# Altium PCB Segway_Charging_Board_PCB.PcbDoc
Units mm, origin at the board's own origin, x right, y up, seen from the top; angles counter-clockwise.
Board outline 37 x 41 mm, 4 copper layers (Top Layer, Layer 1, Layer 2, Bottom Layer), stack 1.57 mm thick; 43 components, 22 nets, 119 pads, 140 vias.
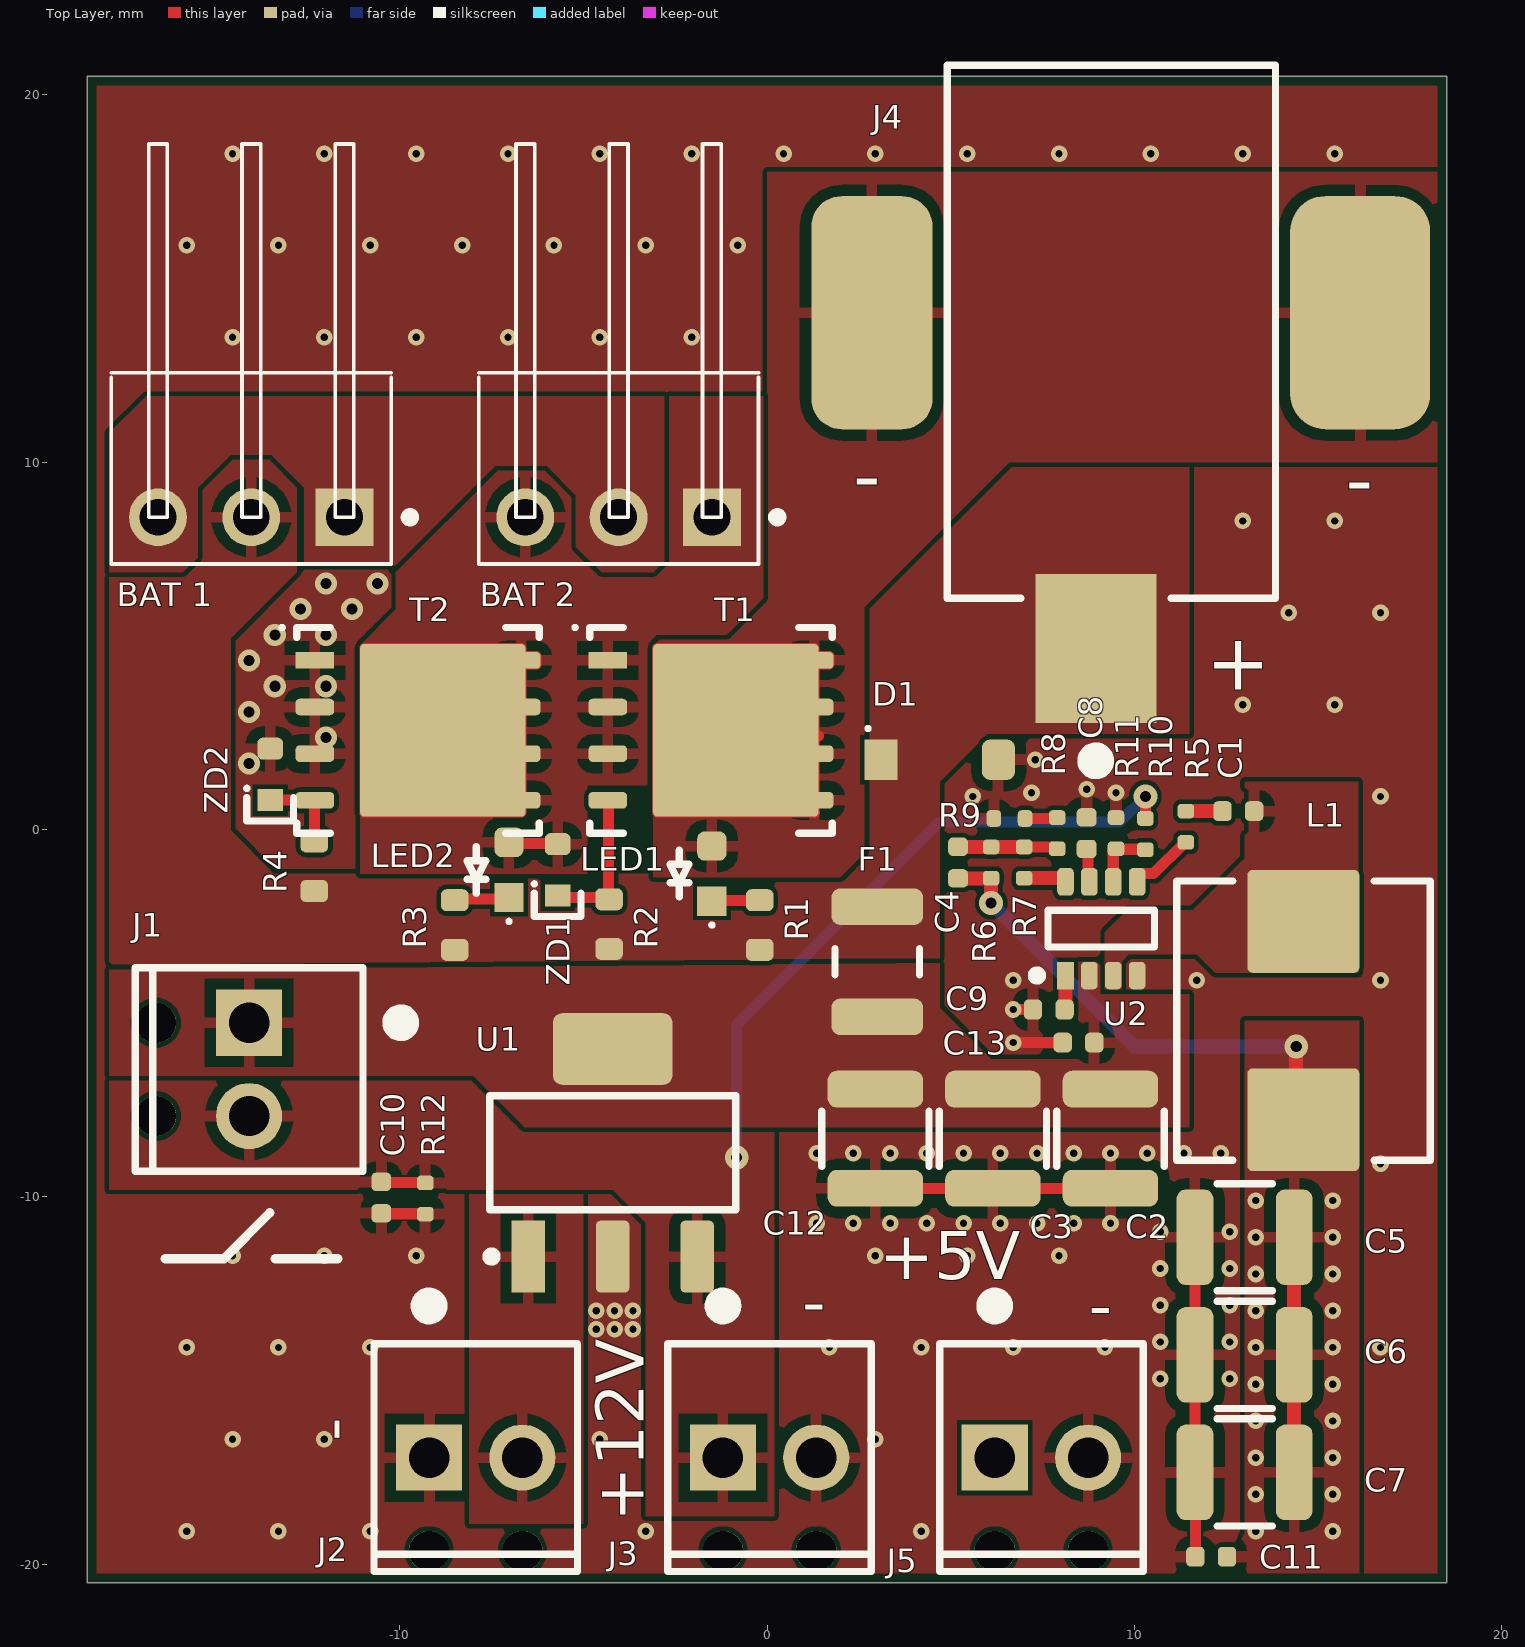
[diagram p0: Top Layer view]
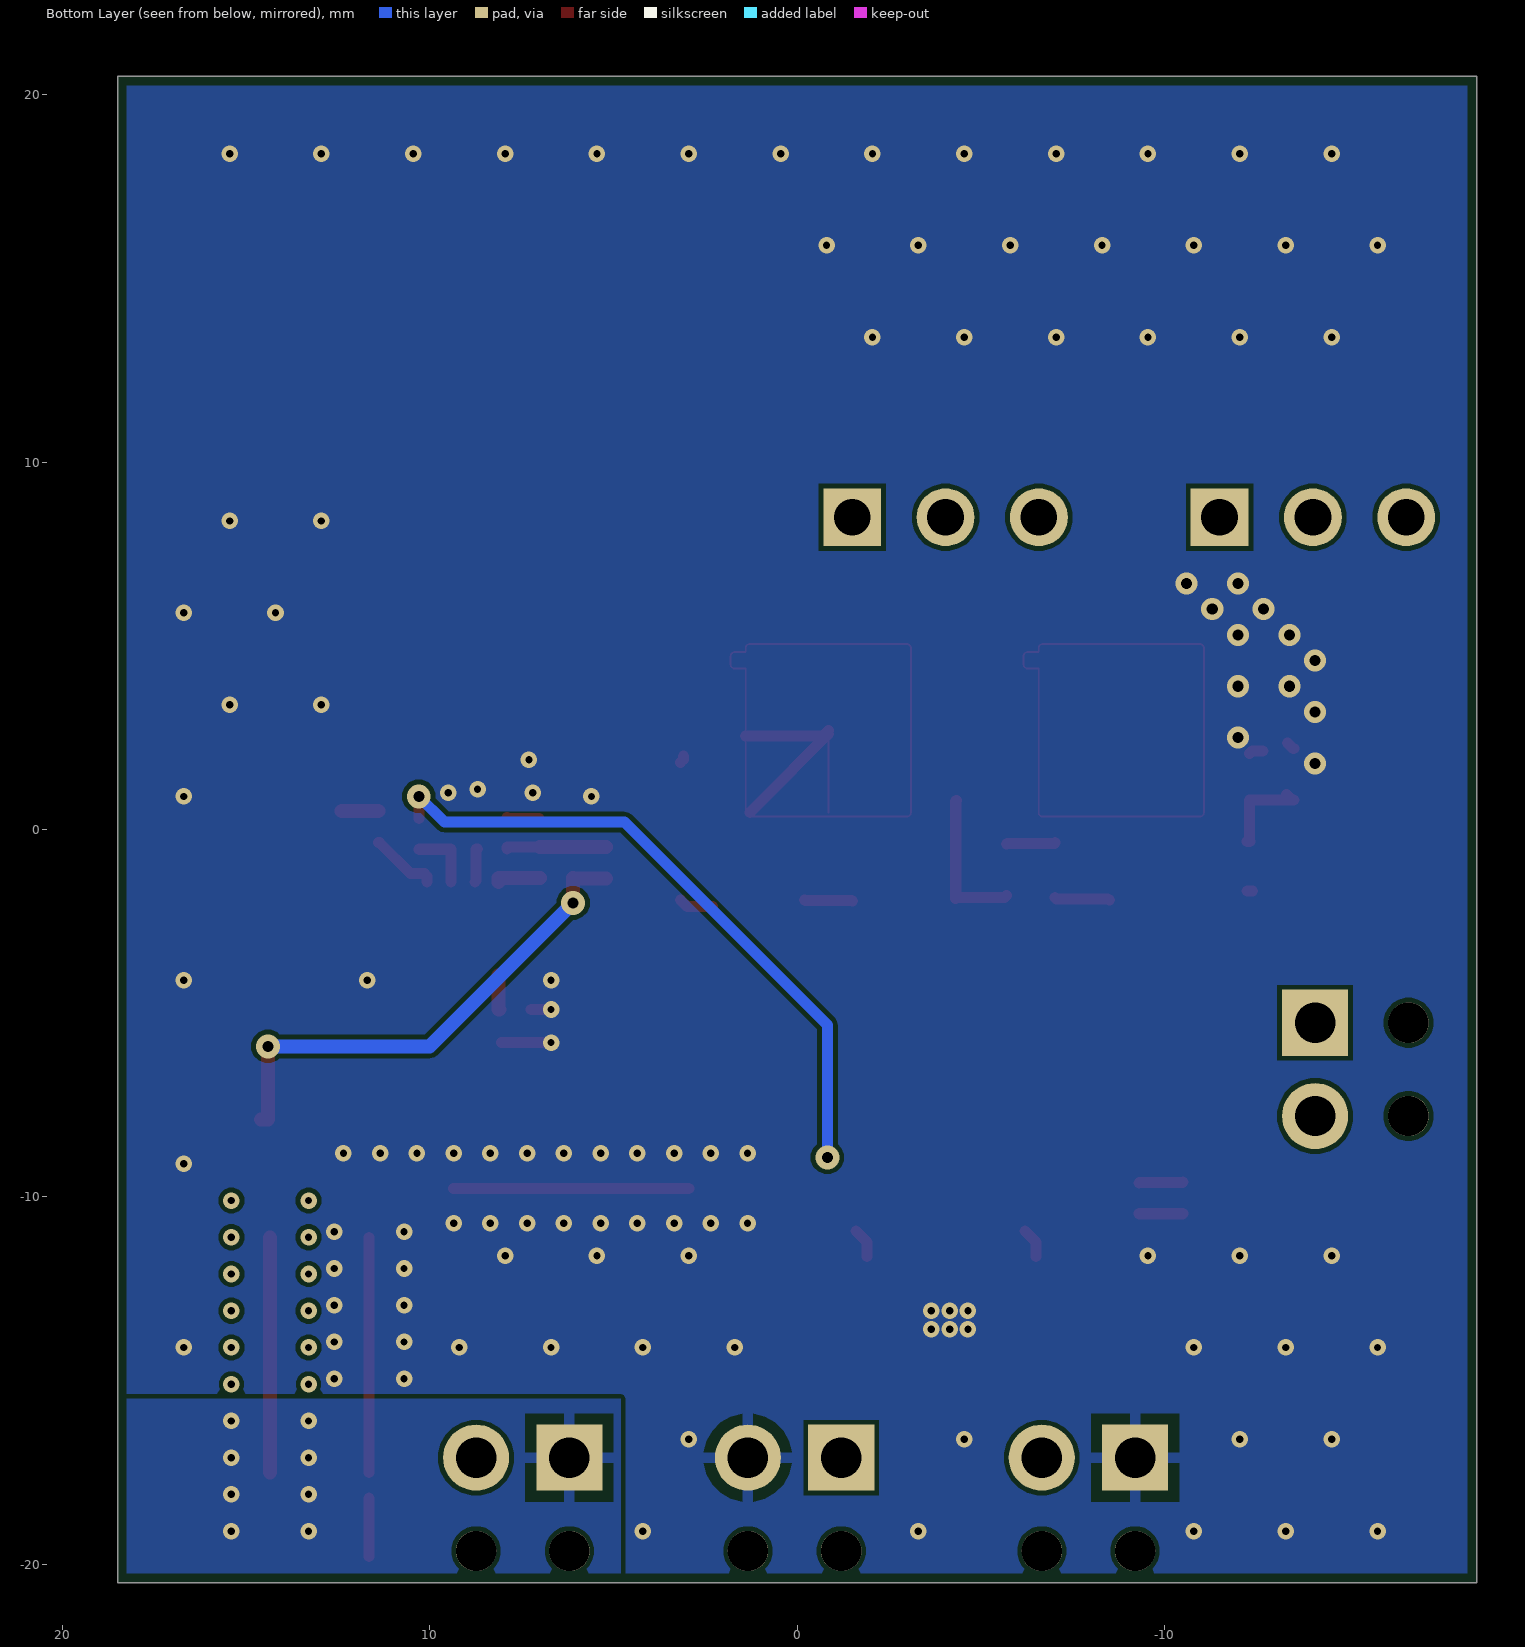
[diagram p1: Bottom Layer view, seen from below]
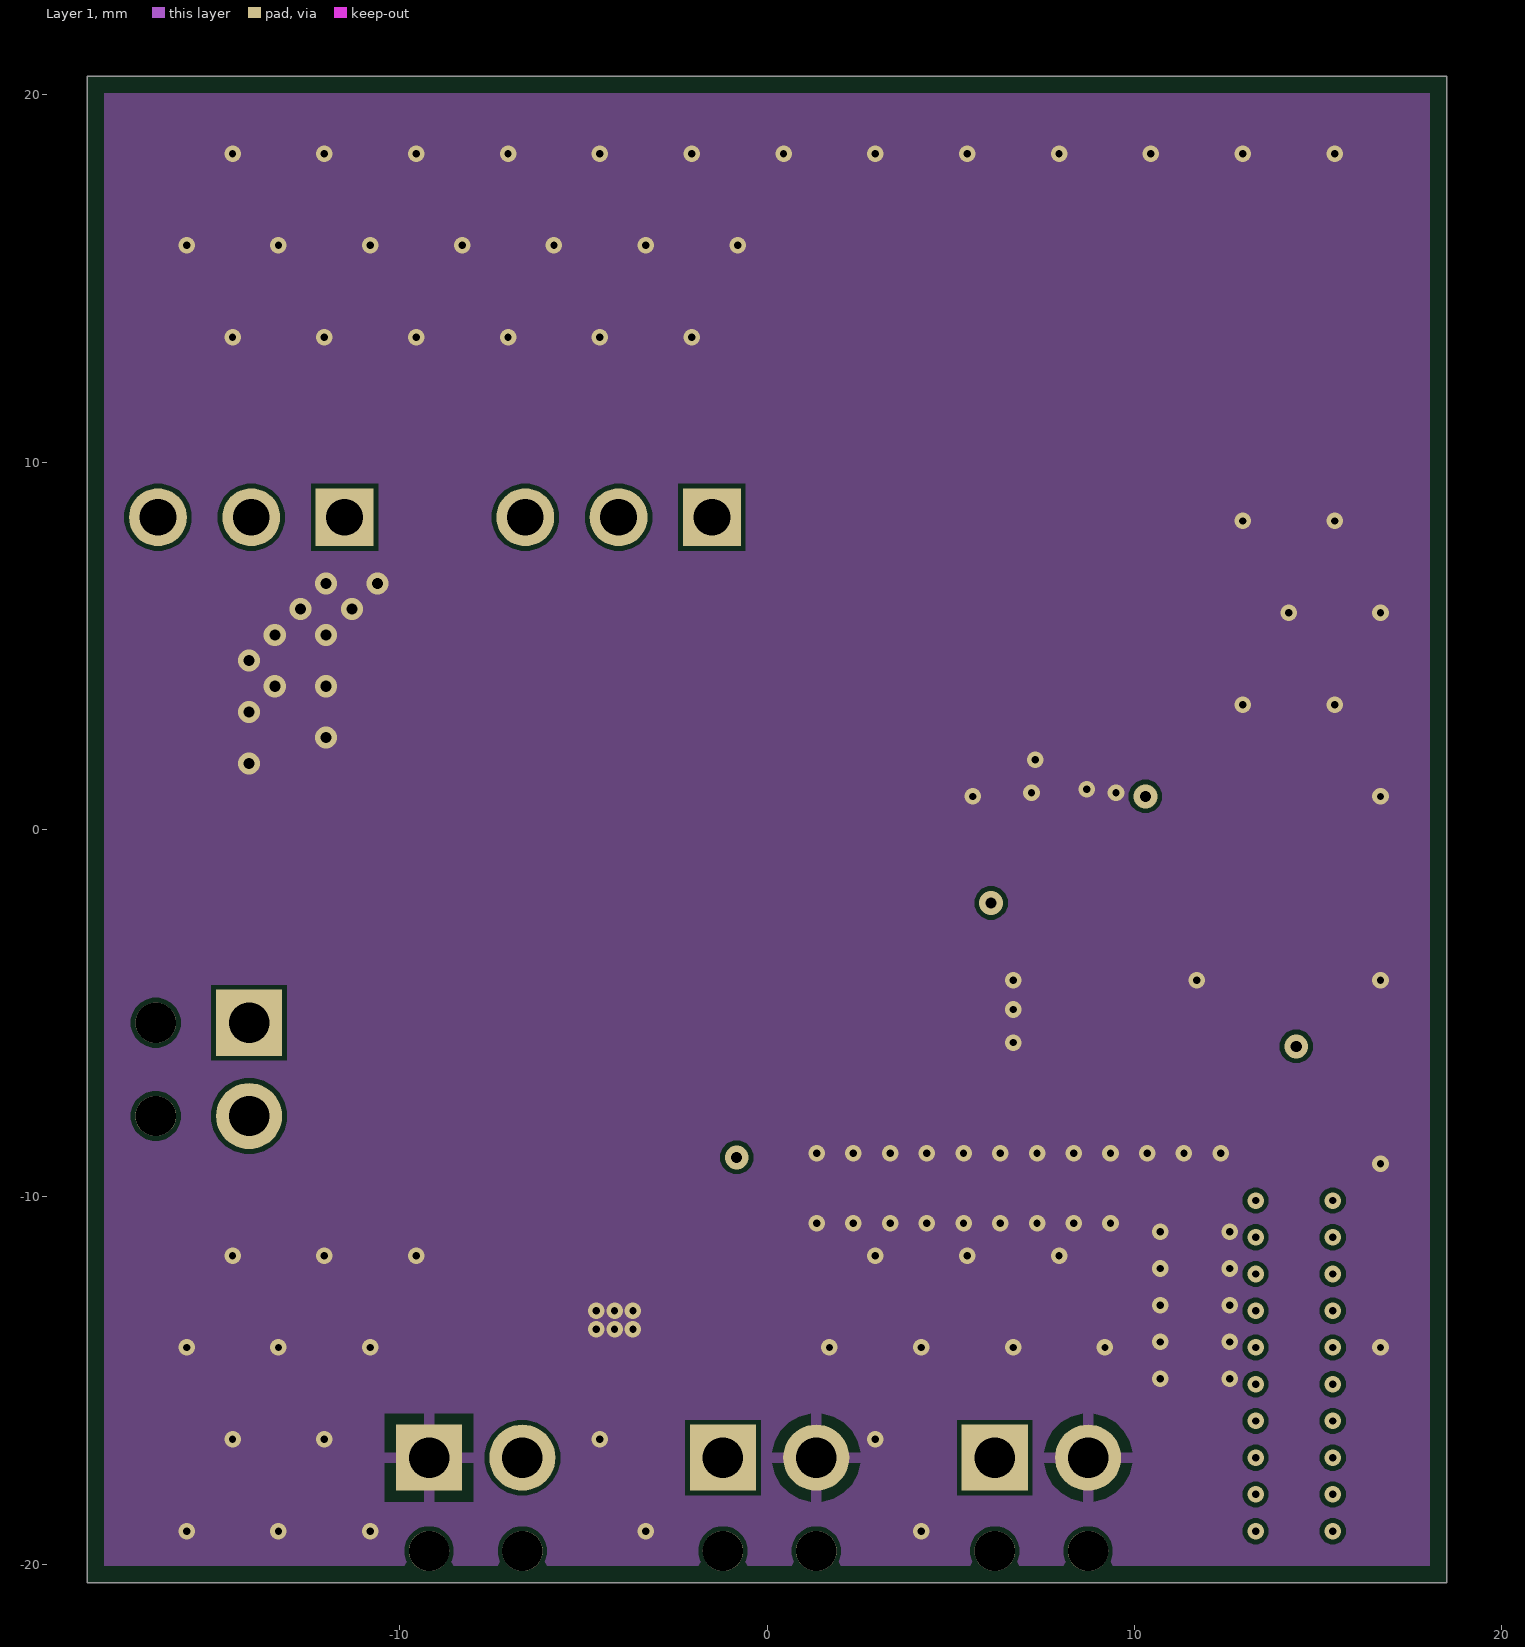
[diagram p2: Layer 1]
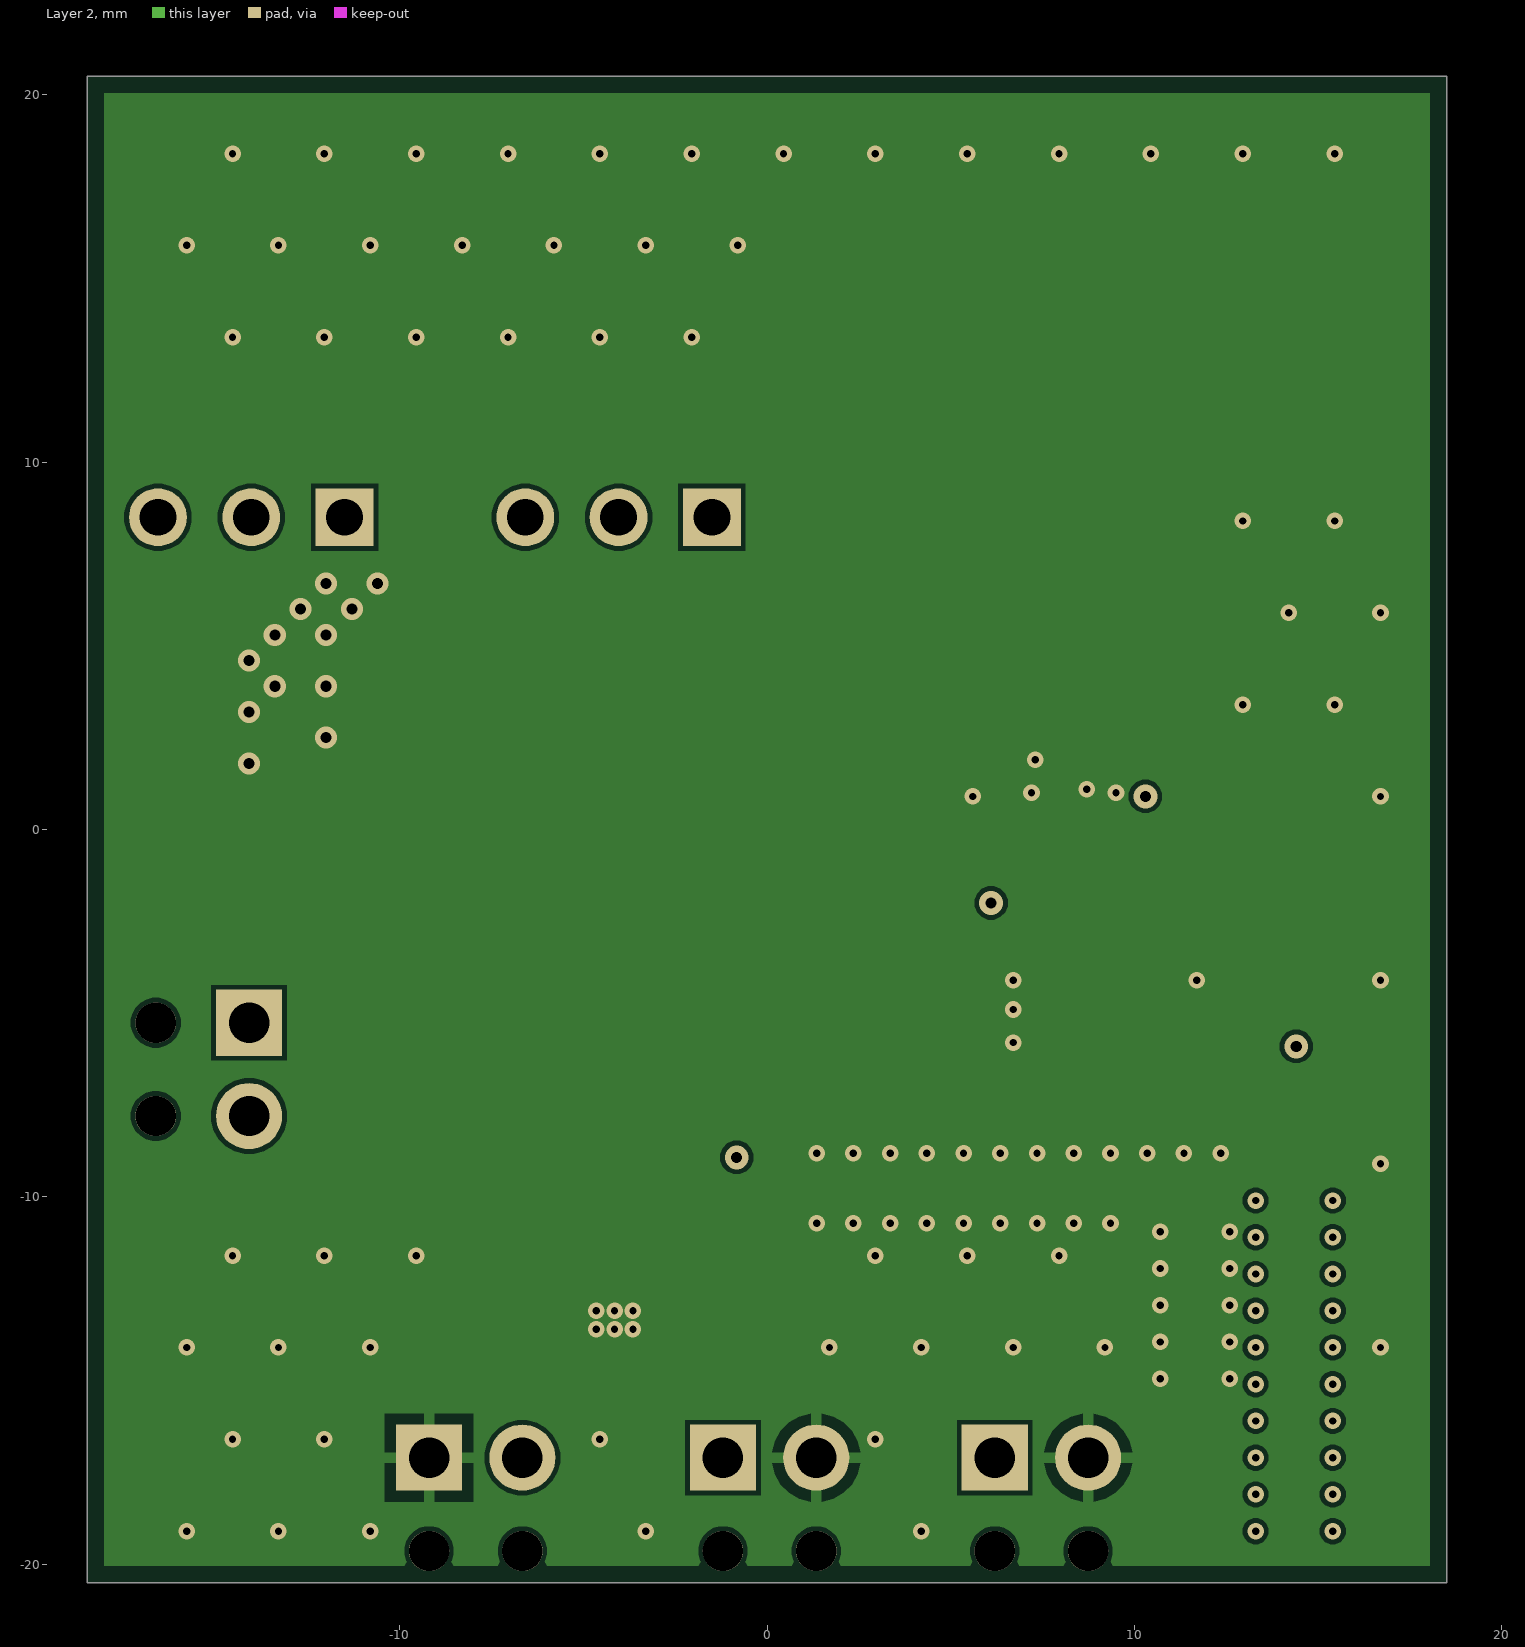
[diagram p3: Layer 2]
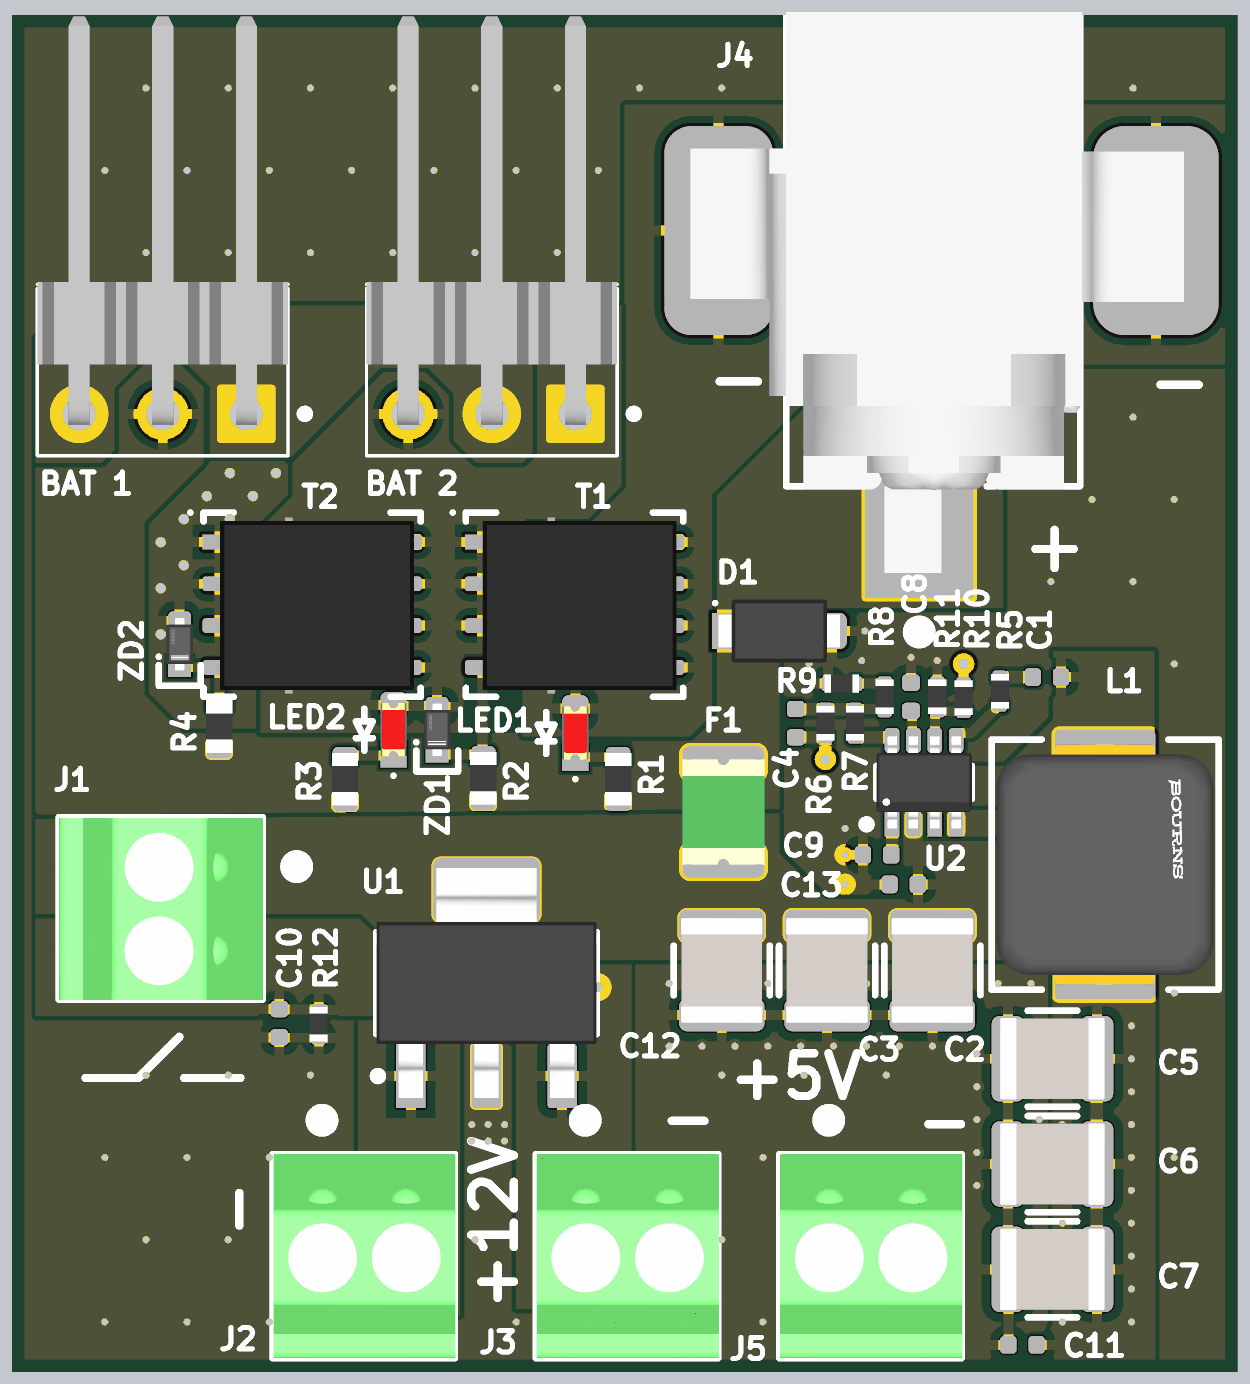
[diagram p4: 3D render of the assembled board from above, using the file's embedded part models]

## Layer stack, top to bottom
Top Solder: solder mask 0.012, Solder Resist, Dk 3.3
Top Layer: signal copper 0.035
Dielectric 1: prepreg 0.18, IS400 - PP, Dk 4.39
Dielectric 2: prepreg 0.18, IS400 - PP, Dk 4.39
Layer 1: signal copper 0.035
Dielectric 3: core 0.71, IS400, Dk 4.52
Layer 2: signal copper 0.035
Dieletric 4: prepreg 0.18, IS400 - PP, Dk 4.39
Dielectric 5: prepreg 0.18, IS400 - PP, Dk 4.39
Bottom Layer: signal copper 0.035
Bottom Solder: solder mask 0.012, Solder Resist, Dk 3.3

## Board outline
-18.5,-20.5 -18.5,20.5 18.5,20.5 18.5,-20.5

## Design rules (kind name [scope] priority, off if disabled: settings)
BoardOutlineClearance BoardOutlineClearance_Outer [OnTopLayer or OnBottomLayer] p1: gap=0.25 ignorepadtopadclearanceinfootprint=FALSE except(0: Arc-SplitContinuation Track-SplitContinuation SMDPad-SplitContinuation THPad-SplitContinuation Via-SplitContinuation Fill-SplitContinuation Poly-SplitContinuation Region-SplitContinuation Text-SplitContinuation; 0.5: Text-OutlineEdge Text-CavityEdge Text-CutoutEdge)
BoardOutlineClearance BoardOutlineClearance_Inner [not(OnTopLayer or OnBottomLayer)] p2: gap=0.45 ignorepadtopadclearanceinfootprint=FALSE except(0: Arc-SplitContinuation Track-SplitContinuation SMDPad-SplitContinuation THPad-SplitContinuation Via-SplitContinuation Fill-SplitContinuation Poly-SplitContinuation Region-SplitContinuation Text-SplitContinuation)
Clearance Clearance_default [All] p1: gap=0.125 ignorepadtopadclearanceinfootprint=TRUE
ComponentClearance [All] p1: gap=0.2 collisioncheckmode=3 verticalgap=0.2 showdistances=FALSE
HoleSize [All] p1: absolutevalues=TRUE maxlimit=5 minlimit=0.15 maxpercent=80.000 minpercent=20.000
HoleToHoleClearance [All] p1: gap=0.35 allowstackedmicrovias=TRUE
MinimumSolderMaskSliver [All] p1: minsoldermaskwidth=0.075
PlaneClearance [All] p1: clearance=0.5
PlaneConnect [All] p1: pad.planeconnectstyle=Relief pad.reliefexpansion=0.5 pad.reliefentries=4 pad.reliefconductorwidth=0.3 pad.reliefairgap=0.3 via.planeconnectstyle=Direct via.reliefexpansion=0.508 via.reliefentries=4 via.reliefconductorwidth=0.254 via.reliefairgap=0.254
PolygonConnect [All] p1: thpad.connectstyle=Relief thpad.reliefconductorwidth=0.3 thpad.reliefentries=4 thpad.polygonreliefangle="90 Angle" thpad.airgapwidth=0.3 smdpad.connectstyle=Relief smdpad.reliefconductorwidth=0.3 smdpad.reliefentries=4 smdpad.polygonreliefangle="90 Angle" smdpad.airgapwidth=0.3 via.connectstyle=Direct via.reliefconductorwidth=0.3 via.reliefentries=4 via.polygonreliefangle="90 Angle" via.airgapwidth=0.3
RoomDefinition PolarityProtection [InComponentClass('PolarityProtection')] p1: confinementstyle=ConfineIn formatcopy=TRUE lockcomponents=FALSE outline 7.115,-7.1 7.115,6.474 -16.357,6.474 -16.357,-7.1
RoomDefinition PowerSupply5V [InComponentClass('PowerSupply5V')] p2: confinementstyle=ConfineIn formatcopy=TRUE lockcomponents=FALSE outline 1.19,-10.622 1.19,-6.212 4.575,-6.212 4.575,0.125 5.625,0.125 5.625,0.875 7.325,0.875 8.075,0.875 8.075,0.925 10.825,0.925 10.825,1.05 11.805,1.05 11.805,1.125 13.855,1.125 13.855,-0.7 18.375,-0.7 18.375,-9.7 15.205,-9.7 15.205,-19.26 13.115,-19.26 13.115,-20.42 11.065,-20.42 11.065,-19.26 10.795,-19.26 10.795,-10.622
RoutingVias [All] p1: holewidth=0.3 width=0.6 viastyle="Through Hole" minholewidth=0.2 minwidth=0.45 maxholewidth=3 maxwidth=5
SilkToSilkClearance [All] p1: silktosilkclearance=0.2
SilkToSolderMaskClearance [IsPad] p1: minsilkscreentomaskgap=0.2 clearancetoexposedcopper=TRUE
SolderMaskExpansion [All] p1: expansion=0.102 istentingtop=FALSE
SupplyNets "Schematic Supply Nets_4" [InNet('GND')] p1: voltage=0.000
SupplyNets "Schematic Supply Nets_9" [InNet('5V')] p2: voltage=0.000
SupplyNets "Schematic Supply Nets_8" [InNet('V_Bat')] p3: voltage=0.000
SupplyNets "Schematic Supply Nets_7" [InNet('V_Motor')] p4: voltage=0.000
SupplyNets "Schematic Supply Nets_6" [InNet('V_BAT_RAW')] p5: voltage=0.000
SupplyNets "Schematic Supply Nets_2" [InNet('V_Bat_ON')] p6: voltage=0.000
SupplyNets "Schematic Supply Nets_1" [InNet('GND_Charge')] p7: voltage=0.000
SupplyNets "Schematic Supply Nets" [InNet('GND_BAT')] p8: voltage=0.000
Width Width_default [All] p1: maxlimit=3 minlimit=0.125 preferedwidth=0.3
22 further rules are at their usual default settings.

## Classes and differential pairs
component class PolarityProtection: D1 F1 LED1 LED2 R1 R2 R3 R4 T1 T2 ZD1 ZD2
component class PowerSupply5V: C1 C2 C3 C4 C5 C6 C7 C8 C9 C11 C12 C13 L1 R5 R6 R7 R8 R9 R10 R11 U2
component class Segway_Charging_Board_SheetName: "BAT 1" "BAT 2" C10 J1 J2 J3 J4 J5 R12 U1

## Components (designator, comment, footprint, x,y, rotation, side; value= is the part's Value field where it differs from the comment)
"BAT 1" "PRPC003SGAN-M71RC" HD254_1x3_MH -11.5,8.5 r180 top
"BAT 2" "PRPC003SGAN-M71RC" HD254_1x3_MH -1.5,8.5 r180 top
C1 "100nF/50V" CAPC1005X05L 12.83,0.5 r180 top value=100nF
C2 "10uF/50V" CAPC3225X25L 9.35,-8.417 r270 top value=10µF
C3 "10uF/50V" CAPC3225X25L 6.15,-8.417 r270 top value=10µF
C4 "15pF/50V" CAPC1005X05L 5.2,-0.9 r90 top value=15pF
C5 "47uF/16V" CAPC3225X25L 13,-11.1 r180 top value=47µF
C6 "47uF/16V" CAPC3225X25L 13,-14.3 r180 top value=47µF
C7 "47uF/16V" CAPC3225X25L 13,-17.5 r180 top value=47µF
C8 "100nF/50V" CAPC1005X05L 8.7,-0.1 r270 top value=100nF
C9 "22nF/50V" CAPC1005X05L 7.67,-4.9 r0 top value=22nF
C10 "100nF/50V" CAPC1005X05L -10.5,-10.02 r90 top value=100nF
C11 "100nF/50V" CAPC1005X05L 12.09,-19.795 r180 top value=100nF
C12 "10uF/50V" CAPC3225X25L 2.95,-8.417 r270 top value=10µF
C13 "100nF/50V" CAPC1005X05L 8.48,-5.8 r180 top value=100nF
D1 "SMF15CA" SODFL370X110-2L 4.7,1.9 r0 top
F1 "1210L050YR" FUSER3225X08L 3,-3.6 r270 top
J1 "MPT 0.5/ 2-2.54 - 1725656" PHOENIX_1725656 -14.1,-5.26 r180 top
J2 "MPT 0.5/ 2-2.54 - 1725656" PHOENIX_1725656 -9.2,-17.1 r270 top
J3 "MPT 0.5/ 2-2.54 - 1725656" PHOENIX_1725656 -1.2,-17.1 r270 top
J4 "RASM722X" SWITCHCRAFT_RASM722X 9.5,9.5 r90 top
J5 "MPT 0.5/ 2-2.54 - 1725656" PHOENIX_1725656 6.2,-17.1 r270 top
L1 "SRP7050TA-5R6M" INDP7366X50L 14.6,-5.2 r270 top
LED1 "LTST-C190KRKT" LEDSC160X80X80-2Lrd -1.5,-1.2 r90 top
LED2 "LTST-C190KRKT" LEDSC160X80X80-2Lrd -7.025,-1.1 r90 top
R1 "9.1kR" RESC1608X06L -0.2,-2.6 r90 top value=9.1k
R2 "100kR" RESC1608X06L -4.3,-2.575 r90 top value=100k
R3 "9.1kR" RESC1608X06L -8.5,-2.6 r90 top value=9.1k
R4 "100kR" RESC1608X06L -12.325,-1 r90 top value=100k
R5 "10R" RESC1005X04L 11.4,0.075 r90 top value=10
R6 "47kR" RESC1005X04L 6.1,-0.9 r90 top value=47k
R7 "33kR" RESC1005X04L 7,-0.9 r90 top value=33k
R8 "5.6kR" RESC1005X04L 7.9,-0.1 r90 top value=5.6k
R9 "3.3kR" RESC1005X04L 6.6,0.3 r180 top value=3.3k
R10 "100kR" RESC1005X04L 10.3,-0.125 r270 top value=100k
R11 "47kR" RESC1005X04L 9.5,-0.1 r270 top value=47k
R12 "10kR" RESC1005X04L -9.3,-10.045 r90 top value=10k
T1 "SIRA64DP" SON127P620X110-9T400X365L#1 -1.525,2.7 r270 top
T2 "SIRA64DP" SON127P620X110-9T400X365L#2 -9.5,2.7 r270 top
U1 "BTS4142N" SOT230P700X180-4L -4.2,-8.8 r0 top
U2 "MP1496SGJ-x" TSOP65P280X100-8L 9.1,-2.7 r0 top
ZD1 "SZMM5Z13VT1G" SODFL160X70-2L -5.7,-1.1 r90 top
ZD2 "SZMM5Z13VT1G" SODFL160X70-2L -13.525,1.5 r90 top

## Footprints (in the part's own frame and the unit in brackets; to place one, negate y for a bottom-side part, rotate by r counter-clockwise, add the part's x,y. Pads: shape width x height; smd on the part's side, far side on the other; paste and mask are expansions set on the pad)
CAPC1005X05L [mm] "Chip Capacitor, 2-Leads, Body 1.00x0.50mm, IPC High Density"
  rrect50% 0.5x0.54 smd mask+0.05: 1(-0.43,0) 2(0.43,0)
  body extent -0.5,-0.25 0.5,0.25, height 0.5
CAPC3225X25L [mm] "Chip Capacitor 1210, 2-Leads, Body 3.20x2.5mm, IPC High Density"
  rrect50% 1x2.6 smd mask+0.05: 1(-1.35,0) 2(1.35,0)
  silkscreen extent -0.75,-1.46 0.75,1.46, body extent -1.6,-1.25 1.6,1.25, height 2.5
FUSER3225X08L [mm] "Resettable Fuse, 2-Leads, Body 3.20x2.50mm, IPC High Density"
  rrect50% 1x2.5 smd: 1(-1.5,0) 2(1.5,0)
  silkscreen extent -0.35,-1.15 0.35,1.15, body extent -1.6,-1.25 1.6,1.25, height 0.85
HD254_1x3_MH [mil] "Header 2.54mm 1x3 Male Horizontal"
  rect 62x62 hole 39.37: 1(0,0)
  round 62 hole 39.37: 2(100,0) 3(200,0)
  silkscreen extent -75,-400 250,50, body extent -50,-476 250,13, height 139
INDP7366X50L [mm] "Precision Wire Wound Inductor, 2-Leads, Body 7.30x6.60mm, IPC High Density"
  rrect10% 2.8x3.05 smd: 1(-2.7,0) 2(2.7,0)
  silkscreen extent -3.8,-3.45 3.8,3.45, body extent -4.3,-3.55 4.3,3.55, height 0.25
LEDSC160X80X80-2Lrd [mm] "LED 0603, 2-Leads, Body 1.6x0.8x0.8mm, red"
  rect 0.8x0.8 smd mask+0.05: 1(-0.75,0)
  rrect50% 0.8x0.8 smd mask+0.05: 2(0.75,0)
  silkscreen extent -1.45,-0.05 0.63,1.14, body extent -0.81,-0.4 0.81,0.4, height 0.6
PHOENIX_1725656 [mm] "THT-2, 2-Leads, Body 5.54x6.2mm, Pitch 2.54mm"
  rect 1.8x1.8 hole 1.1: 1(0,0)
  round 1.8 hole 1.1: 2(0,2.54)
  round 1.1 hole 1.1 unplated mask+0: ""(2.54,2.54) ""(2.54,0)
  silkscreen extent -4.38,-1.5 3.1,4.04, body extent -3.1,-1.48 3.1,4.06, height 8.5
RESC1005X04L [mm] "Chip Resistor 0402, 2-Leads, Body 1.05x0.55mm, IPC High Density"
  rrect50% 0.4x0.45 smd mask+0.05: 1(-0.425,0) 2(0.425,0)
  body extent -0.53,-0.28 0.53,0.28, height 0.4
RESC1608X06L [mm] "Chip Resistor 0603, 2-Leads, Body 1.60x0.80mm, 0.6mm high, IPC High Density"
  rrect50% 0.6x0.75 smd mask+0.05: 1(-0.675,0) 2(0.675,0)
  body extent -0.8,-0.4 0.8,0.4, height 0.55
SODFL160X70-2L [mm] "SODFL-2, 2-Leads, Body 0.80x1.60mm, IPC High Density"
  rect 0.6x0.7 smd mask+0.05: 1(-0.7,0)
  rrect50% 0.6x0.7 smd mask+0.05: 2(0.7,0)
  silkscreen extent -1.27,-0.64 -0.33,0.68, body extent -0.8,-0.4 0.8,0.4, height 0.65
SODFL370X110-2L [mm] "SODFL-2, 2-Leads, Body 1.80x3.70mm, IPC High Density"
  rect 0.9x1.1 smd: 1(-1.6,0)
  rrect50% 0.9x1.1 smd: 2(1.6,0)
  silkscreen extent -2,0.8 -1.9,0.9, body extent -1.85,-0.95 1.85,0.95, height 1.1
SON127P620X110-9T400X365L#1 [mm] "SON-8, 8-Leads, Body 5.15x6.15mm, Pitch 1.27mm, Thermal Pad 4.00x3.65mm, IPC High Density"
  rect 0.45x1.05 smd: 1(-1.905,-2.81)
  rrect50% 0.45x1.05 smd: 2(-0.635,-2.81) 3(0.635,-2.81) 4(1.905,-2.81) 5(1.905,2.81) 6(0.635,2.81) 7(-0.635,2.81) 8(-1.905,2.81)
  rrect5% 4.7x4.5 smd: 8(0,0.675)
  Top Layer lines w0.05: 2.238,0.675 0,0.675 ; 2.238,-1.575 ccw(c2.238,-1.463) 2.35,-1.463 2.35,0.25 2.35,0.675 2.35,2.813 ccw(c2.238,2.813) 2.238,2.925 0.15,2.925 -1.68,2.925 -1.68,3.223 ccw(c-1.792,3.223) -1.792,3.335 -1.905,3.335 -2.018,3.335 ccw(c-2.018,3.223) -2.13,3.223 -2.13,2.925 -2.238,2.925 ccw(c-2.238,2.813) -2.35,2.813 -2.35,-1.463 ccw(c-2.238,-1.463) -2.238,-1.575 2.238,-1.575
  silkscreen extent -2.85,-3.75 2.8,3.3, body extent -2.65,-2.92 2.7,3.23, height 1
SON127P620X110-9T400X365L#2 [mm] "SON-8, 8-Leads, Body 5.15x6.15mm, Pitch 1.27mm, Thermal Pad 4.00x3.65mm, IPC High Density"
  rect 0.45x1.05 smd: 1(-1.905,-2.81)
  rrect50% 0.45x1.05 smd: 2(-0.635,-2.81) 3(0.635,-2.81) 4(1.905,-2.81) 5(1.905,2.81) 6(0.635,2.81) 7(-0.635,2.81) 8(-1.905,2.81)
  rrect5% 4.7x4.5 smd: 8(0,0.675)
  Top Layer lines w0.05: 2.238,-1.575 ccw(c2.238,-1.463) 2.35,-1.463 2.35,2.813 ccw(c2.238,2.813) 2.238,2.925 -1.68,2.925 -1.68,3.223 ccw(c-1.792,3.223) -1.792,3.335 -1.905,3.335 -2.018,3.335 ccw(c-2.018,3.223) -2.13,3.223 -2.13,2.925 -2.238,2.925 ccw(c-2.238,2.813) -2.35,2.813 -2.35,-1.463 ccw(c-2.238,-1.463) -2.238,-1.575 2.238,-1.575
  silkscreen extent -2.85,-3.75 2.8,3.3, body extent -2.65,-2.92 2.7,3.23, height 1
SOT230P700X180-4L [mm] "SOT-223-4, 4-Leads, Body 6.50x3.70mm (avg), Pitch 2.30mm, IPC High Density"
  rect 0.9x1.95 smd mask+0.05: 1(-2.3,-2.825)
  rrect24% 0.9x1.95 smd mask+0.05: 2(0,-2.825) 3(2.3,-2.825)
  rrect25% 3.25x1.95 smd mask+0.05: 4(0,2.825)
  silkscreen extent -3.42,-2.95 3.35,1.55, body extent -3.35,-3.5 3.35,3.5, height 1.8
SWITCHCRAFT_RASM722X [mm] "SMD-3, 3-Leads, Body 14.50x9.00mm"
  rect 4.06x3.3 smd: 1(-4.57,0.545)
  rrect50% 6.35x3.81 smd: 2(4.57,-6.645)
  rrect50% 6.35x3.3 smd: 3(4.57,6.645)
  silkscreen extent -7.88,-4.34 11.3,4.59, body extent -5.84,-7.5 11.23,7.5, height 11.1
TSOP65P280X100-8L [mm] "TSOP-8, 8-Leads, Body 2.90x1.63mm, Pitch 0.65mm, IPC High Density"
  rect 0.45x0.75 smd mask+0.05: 1(-0.975,-1.275)
  rrect50% 0.45x0.75 smd mask+0.05: 2(-0.325,-1.275) 3(0.325,-1.275) 4(0.975,-1.275) 5(0.975,1.275) 6(0.325,1.275) 7(-0.325,1.275) 8(-0.975,1.275)
  silkscreen extent -1.87,-1.4 1.45,0.5, body extent -1.45,-1.4 1.45,1.4, height 1

## Part data
"BAT 1" "BAT 2": library part CMP-002-00172-18, "Header, 1x3Pin, Pitch 2.54mm, Male, Horizontal, THT", Manufacturer="Sullins Connector Solutions", Angle=Horizontal, Gender=Male, Insulation Height=2.5mm, Mating Length=8.08m, Mounting Technology=THT, Overall Contact Length=0mm, Pin Mapping=1x3, Pins=3, Pitch=2.54mm, Pitch Row=2.54mm, Termination Length=3.05mm
C1 C8 C10 C11 C13: library part CMP-001-00067-18, "Cap MLCC, 100nF, 50V, X7R, 10%, 0402", Case Code (Metric)=1005, Case/Package=0402, Dielectricum=X7R, Tolerance=10%, Voltage Rating=50V, Mounting Technology=SMD, Type=MLCC
C2 C3 C12: library part CMP-00032-8, "Cap MLCC, 10uF, 50V, X7R, 20%, 1210", Case Code (Metric)=3525, Case/Package=1210, Dielectricum=X7R, Tolerance=20%, Voltage Rating=50V, Mounting Technology=SMD, Type=MLCC
C4: library part CMP-00153-5, "Cap MLCC, 15pF, 50V, C0G, 5%, 0402", Case Code (Metric)=1005, Case/Package=0402, Dielectricum=C0G, Tolerance=5%, Voltage Rating=50V, Mounting Technology=SMD, Type=MLCC
C5 C6 C7: library part CMP-001-00097-16, "Cap MLCC, 47uF, 16V, X5R, 20%, 1210", Case Code (Metric)=3525, Case/Package=1210, Dielectricum=X5R, Tolerance=20%, Voltage Rating=16V, Mounting Technology=SMD, Type=MLCC
C9: library part CMP-001-00062-18, "Cap MLCC, 22nF, 50V, X7R, 10%, 0402", Case Code (Metric)=1005, Case/Package=0402, Dielectricum=X7R, Tolerance=10%, Voltage Rating=50V, Mounting Technology=SMD, Type=MLCC
D1: library part CMP-004-00062-15, "TVS Diode, bidirectional, 15V, 8.2A, 200W, SOD-123FL-2", Case/Package=SOD-123FL-2, Peak Current=8.2A, Peak Power=200W, Rated Voltage=15V, Connection=single, Direction=bidirectional, Mounting Technology=SMD, Size=0
F1: library part CMP-00093-10, "Resettable Fuse, Ihold 500mA, Itrip 1A, 13.2V, 1210", Case/Package=1210, Voltage Rating=13.2V, Ihold=500mA, Itrip=1A, Mounting Technology=SMD
J1 J2 J3 J5: library part CMP-070-000011-17, "Wire to Board, Screw, 2 Pin, Pitch 2.54mm, 6A, 160V, Horizontal, THT, L6.2B5.54H12", Manufacturer=Phoenix, Max Current=6A, Max Voltage=160V, Angle=Horizontal, Connection=Screw, Family Name=MPT, Mounting Technology=THT, Pin Mapping=1x2, Pins=2, Pitch=2.54mm, Size=L6.2B5.54H12, Type="Wire to Board"
J4: library part CMP-002-00013-23, "Barrel Power Jack, 3 Pin, Male, 5A, 250V, Horizontal, SMD, L14.4B9H11, Diameter 2.0/5.5mm", Manufacturer=Switchcraft, Max Current=5A, Max Voltage=250V, Angle=Horizontal, Connection=Pluggable, Gender=Male, Mating Part=S760, Mounting Technology=SMD, Pin Mapping=2+1, Pins=3, Pitch=0mm, Size=L14.5B9H11, Type=Jack
L1: library part CMP-006-00040-7, "Coil, 5.6uH, 49mR, 6A, 20%, 6A, 2626", Case/Package=2626, Current=6A, Inductivity=5.6µH, Resistance DC=49m, Tolerance=20%, Mounting Technology=SMD
LED1 LED2: library part CMP-007-00024-16, "LED, Red, 20mA, 2.0V, 0603", Case/Package=0603, Color=Red, Forward Voltage=2V, Rated Current=20mA, Mounting Technology=SMD, Size=L1.6B0.8H0.8
R1 R3: library part CMP-009-00472-1, "Res, 9.1kR, 1%, 0.1W, 0603", Case Code (Metric)=1608, Case/Package=0603, Power=100mW, Tolerance=1%, Voltage Rating=75V, Mounting Technology=SMD, Type=Fixed
R2 R4: library part CMP-009-00023-30, "Res, 100kR, 1%, 0.1W, 0603", Case Code (Metric)=1608, Case/Package=0603, Power=100mW, Tolerance=1%, Voltage Rating=50V, Mounting Technology=SMD, Type=Fixed
R5: library part CMP-009-00152-29, "Res, 10R, 1%, 0.063W, 0402", Case Code (Metric)=1005, Case/Package=0402, Power=63mW, Tolerance=1%, Voltage Rating=50V, Mounting Technology=SMD, Type=Fixed
R6 R11: library part CMP-009-00137-31, "Res, 47kR, 1%, 0.063W, 0402", Case Code (Metric)=1005, Case/Package=0402, Power=63mW, Tolerance=1%, Voltage Rating=50V, Mounting Technology=SMD, Type=Fixed
R7: library part CMP-009-00028-32, "Res, 33kR, 1%, 0.063W, 0402", Case Code (Metric)=1005, Case/Package=0402, Power=63mW, Tolerance=1%, Voltage Rating=50V, Mounting Technology=SMD, Type=Fixed
R8: library part CMP-009-00136-30, "Res, 5.6kR, 1%, 0.063W, 0402", Case Code (Metric)=1005, Case/Package=0402, Power=63mW, Tolerance=1%, Voltage Rating=50V, Mounting Technology=SMD, Type=Fixed
R9: library part CMP-009-00085-21, "Res, 3.3kR, 1%, 0.063W, 0402", Case Code (Metric)=1005, Case/Package=0402, Power=63mW, Tolerance=1%, Voltage Rating=50V, Mounting Technology=SMD, Type=Fixed
R10: library part CMP-009-00022-33, "Res, 100kR, 1%, 0.1W, 0402", Case Code (Metric)=1005, Case/Package=0402, Power=100mW, Tolerance=1%, Voltage Rating=50V, Mounting Technology=SMD, Type=Fixed
R12: library part CMP-009-00149-32, "Res, 10kR, 1%, 0.1W, 0402", Case Code (Metric)=1005, Case/Package=0402, Power=100mW, Tolerance=1%, Voltage Rating=50V, Mounting Technology=SMD, Type=Fixed
T1 T2: library part CMP-013-00069-15, "MOSFET N-Enh, 30V, 60A, 100Ap, 2.1mR, 27.8W, SO-8", Case/Package=PowerPAK-SO-8, Current=60A, Current peak=100A, Power=27.8W, Resistance=2.1m, Voltage=30V, Mounting Technology=SMD, Technology=N-enh, Type=MOSFET
U1: library part CMP-013-00047-18, "High-Side Switch, 1 Ch, 12..45V, 1.4A, SOT-223-4", Case/Package=SOT-223-4, Max Current=1.4A, Max Logic Voltage=45V, Min Logic Voltage=12V, Channels=1, Function="High-Side Switch", Max Power Voltage=45V, Min Power Voltage=12V, Mounting Technology=SMD
U2: library part CMP-00363-5, "Buck Converter, 0.8..15.2V, 2A, 4.5..16Vin, TSOP-8", Case/Package=TSOP-8, Frequency=500kHz, Max In Voltage=16V, Max Out Current=2A, Max Out Voltage=15.2V, Min In Voltage=4.5V, Min Out Voltage=800mV, Mounting Technology=SMD
ZD1 ZD2: library part CMP-004-00080-13, "Zener Diode, 13.25V±0.85V, 5mA, 30R, 500mW, SOD-523-2", Case/Package=SOD-523-2, Current=100nA, Power=500mW, Voltage=13.25V, Mounting Technology=SMD, Type=Zener

## Via types
v1: diameter 0.45, hole 0.2, Top Layer to Bottom Layer, tented both sides, 122 vias
v2: diameter 0.6, hole 0.3, Top Layer to Bottom Layer, tented both sides, 12 vias
v3: diameter 0.65, hole 0.3, Top Layer to Bottom Layer, 4 vias
v4: diameter 0.45, hole 0.2, Top Layer to Bottom Layer, 2 vias

## Nets (pads, with @x,y where several pads share a name; then routed paths per layer and width w, separated by ;. In a path a pad name is that pad's centre, name@x,y a point inside that pad or via, vN(x,y) a via of type N, cw(c..) or ccw(c..) an arc to the next point about the centre after c; other vN are vias at no path point)
5V: C4.1 C5.1 C6.1 C7.1 C11.1 J5.1 L1.2 R6.1 | length 20.1
  Top Layer w0.381: C4.1 5.202,-1.328 6.097,-1.328 R6.1 v3(6.1,-2) ; C7.1 C6.1 C5.1 ; v3(14.406,-5.906) 14.406,-7.9 L1.2
  Bottom Layer w0.381: v3(6.1,-2) 10.006,-5.906 v3(14.406,-5.906)
  other v1: 13.3,-19.1 15.4,-19.1 13.3,-18.1 15.4,-18.1 13.3,-17.1 15.4,-17.1 13.3,-16.1 15.4,-16.1 13.3,-15.1 15.4,-15.1 13.3,-14.1 15.4,-14.1 13.3,-13.1 15.4,-13.1 13.3,-12.1 15.4,-12.1 13.3,-11.1 15.4,-11.1 13.3,-10.1 15.4,-10.1
GND: C2.2 C3.2 C5.2 C6.2 C7.2 C8.1 C9.1 C10.1 C11.2 C12.2 C13.2 D1.2 J2.1 J3.2 J5.2 R9.2 R11.1 R12.1 T2.1 T2.2 T2.3 U1.2 U2.4 ZD2.2 | length 18.1
  Top Layer w0.3: ZD2.2 -13.5,2.2 ZD2.2@-13.35,2.35 ; T2.3@-12.685,2.14 -12.385,2.14 T2.3 ; C10.1 -10.49,-10.46 -9.31,-10.46 R12.1 ; C12.2 C2.2 ; v4(6.7,-5.8) C13.2 ; v4(6.7,-4.9) C9.1 ; C7.2 C6.2 C5.2 ; C11.2 C7.2@11.66,-18.2
  other v1: -15.8,-19.1 -13.3,-19.1 -10.8,-19.1 -3.3,-19.1 4.2,-19.1 -14.55,-16.6 -12.05,-16.6 -4.55,-16.6 2.95,-16.6 10.7,-14.95 12.6,-14.95 -15.8,-14.1 -13.3,-14.1 -10.8,-14.1 1.7,-14.1 4.2,-14.1 6.7,-14.1 9.2,-14.1 16.7,-14.1 10.7,-13.95 12.6,-13.95 -4.65,-13.6 -4.15,-13.6 -3.65,-13.6 -4.65,-13.1 -4.15,-13.1 -3.65,-13.1 10.7,-12.95 12.6,-12.95 10.7,-11.95 12.6,-11.95 -14.55,-11.6 -12.05,-11.6 -9.55,-11.6 2.95,-11.6 5.45,-11.6 7.95,-11.6 10.7,-10.95 12.6,-10.95 1.35,-10.717 2.35,-10.717 3.35,-10.717 4.35,-10.717 5.35,-10.717 6.35,-10.717 7.35,-10.717 8.35,-10.717 9.35,-10.717 16.7,-9.1 1.35,-8.817 2.35,-8.817 3.35,-8.817 4.35,-8.817 5.35,-8.817 6.35,-8.817 7.35,-8.817 8.35,-8.817 9.35,-8.817 10.35,-8.817 11.35,-8.817 12.35,-8.817 6.7,-4.1 11.7,-4.1 16.7,-4.1 5.6,0.9 16.7,0.9 7.2,1 9.5,1 8.7,1.1 7.3,1.9 12.95,3.4 15.45,3.4 14.2,5.9 16.7,5.9 12.95,8.4 15.45,8.4 -14.55,13.4 -12.05,13.4 -9.55,13.4 -7.05,13.4 -4.55,13.4 -2.05,13.4 -15.8,15.9 -13.3,15.9 -10.8,15.9 -8.3,15.9 -5.8,15.9 -3.3,15.9 -0.8,15.9 -14.55,18.4 -12.05,18.4 -9.55,18.4 -7.05,18.4 -4.55,18.4 -2.05,18.4 0.45,18.4 2.95,18.4 5.45,18.4 7.95,18.4 10.45,18.4 12.95,18.4 15.45,18.4
  other v2: -14.1,1.8 -12,2.5 -14.1,3.2 -13.4,3.9 -12,3.9 -14.1,4.6 -13.4,5.3 -12,5.3 -12.7,6 -11.3,6 -12,6.7 -10.6,6.7
"GND BAT1": "BAT 1.1" "BAT 1.3" "BAT 2.2"
GND_BAT: "BAT 2.1" "BAT 2.3" LED2.2 T1.1 T1.2 T1.3 T2.5 T2.6 T2.7 T2.8 ZD1.2 | length 1.3
  Top Layer w0.3: LED2.2 -7,-0.375 -5.725,-0.375 ZD1.2
GND_Charge: J4.2 J4.3 LED1.2 T1.5 T1.6 T1.7 T1.8 | length 5.3
  Top Layer w0.3: T1.8@-0.85,2.6 -0.75,2.5 0.97,0.78 T1.8@1.287,0.462 ; T1.8@-0.85,2.7 -0.7,2.55 1.4,2.55
NetC1_1: C1.1 L1.1 U2.3
NetC1_2: C1.2 R5.2 | length 1
  Top Layer w0.381: R5.2 C1.2
NetC4_2: C4.2 R6.2 R7.2 R8.1 | length 2.8
  Top Layer w0.3: R7.2 7.9,-0.475 R8.1
  Top Layer w0.381: C4.2 5.2,-0.475 R6.2 R7.2
NetC8_2: C8.2 U2.7 | length 0.9
  Top Layer w0.3: C8.2 8.737,-0.53 8.737,-1.388 U2.7
NetC9_2: C9.2 U2.1 | length 0.9
  Top Layer w0.381: C9.2 8.125,-4.9 U2.1
NetLED1_1: LED1.1 R1.2 | length 1.3
  Top Layer w0.3: LED1.1 -1.488,-1.938 -0.213,-1.938 R1.2
NetLED2_1: LED2.1 R3.2 | length 1.5
  Top Layer w0.3: R3.2 -8.463,-1.888 -7.063,-1.888 LED2.1
NetR2_2: R2.2 T1.4 ZD1.1 | length 4.1
  Top Layer w0.3: ZD1.1 -5.65,-1.85 -4.35,-1.85 -4.318,-1.883 -4.318,0.777 T1.4
NetR4_2: R4.2 T2.4 ZD2.1 | length 2.7
  Top Layer w0.3: ZD2.1@-13.325,0.95 -13.475,0.8 ZD2.1 -13.523,0.797 -12.313,0.797 -12.318,0.792 -12.318,-0.317 R4.2 R4.2@-12.25,-0.325
NetR5_1: R5.1 U2.5 | length 1.9
  Top Layer w0.3: U2.5 10.075,-1.275 10.15,-1.2 10.525,-1.2 11.375,-0.35 R5.1
NetR7_1: R7.1 U2.8 | length 1.2
  Top Layer w0.381: R7.1 8.125,-1.325 U2.8
NetR8_2: R8.2 R9.1 | length 0.9
  Top Layer w0.3: R9.1 7.9,0.3 R8.2
NetR10_2: R10.2 R11.2 U2.6 | length 1.8
  Top Layer w0.3: U2.6 9.425,-0.538 10.287,-0.538 R10.2
V_Bat: C2.1 C3.1 C12.1 C13.1 F1.2 J1.1 U1.4 U2.2
V_Bat_ON: C10.2 J1.2 J3.1 R10.1 R12.2 U1.3 | length 19.9
  Top Layer w0.3: C10.2 -10.485,-9.605 -9.315,-9.605 R12.2 ; U1.3 -1.9,-11.225 U1.3@-1.6,-10.925 ; R10.1 v3(10.3,0.9)
  Bottom Layer w0.3: v3(-0.825,-8.925) -0.825,-5.325 4.7,0.2 9.6,0.2 v3(10.3,0.9)
V_BAT_RAW: "BAT 1.2" D1.1 F1.1 J4.1 R1.1 R2.1 R3.1 R4.1 | length 1.7
  Top Layer w0.3: -14.15,8.39 -14.04,8.5 ; R4.1@-12.4,-1.675 R4.1 R4.1@-12.25,-1.675 ; F1.1@2.304,-2.1 F1.1 ; D1.1@3.1,2 D1.1 D1.1@3.175,1.825 ; F1.1 3.175,-1.925 F1.1
V_Motor: J2.2 U1.1 | length 1.1
  Top Layer w0.3: J2.2 J2.2@-6.433,-16.873 ; U1.1 -6.5,-11.225 U1.1@-6.2,-10.925
pads on no net: J1. J2. J3. J5.

## Polygon pours and split planes (outlines as drawn)
V_Bat on Top Layer "V_BAT_L01_P025" (solid, pour order 25): 3.5,-3.645 4.7,-3.645 4.7,-4.846 6.104,-6.25 8.475,-6.25 8.475,-3.605 9.065,-3.6 9.065,-4.485 11.5,-4.485 11.5,-8.1 -6.6,-8.1 -8,-6.7 -17.9,-6.7 -17.9,-3.82
GND on Top Layer "GND_L01_P032" (solid, remove dead copper, pour order 32): -18.5,-20.5 -18.5,20.5 18.5,20.5 18.5,-20.5
V_BAT_RAW on Top Layer "V_BAT_RAW_L01_P031" (solid, pour order 31): 4.7,1.3 6,2.6 11.5,2.6 11.5,10.2 2.8,10.2 2.8,-0.5 2.1,-1.2 -13.425,-1.2 -14.6,-0.025 -14.6,5.2 -12.8,7 -12.8,7.4 -12.8,9.5 -13.5,10.2 -14.6,10.2 -17.9,6.9 -17.9,-3.8 4.7,-3.8
"GND BAT1" on Top Layer "GND_BAT1_L01_P001" (solid, pour order 1): -6,9.9 -5.2,9.1 -5.2,7.7 -4.5,7 -3.1,7 -2.8,7.3 -2.8,11.8 -16.9,11.8 -17.9,10.8 -17.9,7 -15.9,7 -15.5,7.4 -15.5,9.3 -14.6,10.2 -13.5,10.2 -12.6,9.3 -12.6,7.2 -10.1,7.2 -7.4,9.9
NetC1_1 on Top Layer "NETC1_1_L01_P002" (solid, pour order 2): 13.01,-0.786 13.01,1.3 16.1,1.3 16.1,-3.9 12.2,-3.9 11.7,-3.4 9.85,-3.4 9.65,-3.6 9.65,-4.35 9.2,-4.35 9.2,-2.8 9.8,-2.2 11.596,-2.2
5V on Top Layer "5V_L01_P019" (solid, pour order 19): 12.145,-20.245 12.1,-20.2 12.1,-19.2 13,-19.2 13,-5.2 16.125,-5.2 16.125,-20.245
GND_BAT on Top Layer "GND_BAT_L01_P020" (solid, pour order 20): -11.075,5.017 -10.1,5.992 -10.1,7 -5.3,11.8 -0.1,11.8 -0.1,6.3 -1.1,5.3 -3,5.3 -3.2,5.1 -3.2,1.306 -3.094,1.2 -4.9,1.2 -4.9,-1.2 -11.075,-1.2
GND_Charge on Top Layer "GND_CHARGE_L01_P022" (solid, pour order 22): 0,8.084 0,17.9 18.5,17.9 18.5,10 6.6,10 2.65,6.05 2.65,-0.65 2,-1.3 -3.1,-1.3 -3.1,4.984
V_Motor on Top Layer "V_MOTOR_L01_P026" (solid, pour order 26): -5,-9.935 -8.1,-9.935 -8.1,-18.9 -5,-18.9
V_Bat_ON on Top Layer "V_BAT_ON_L01_P030" (solid, pour order 30): -8,-6.8 -6.7,-8.1 0.2,-8.1 0.2,-18.7 -3.3,-18.7 -3.3,-10.7 -4.2,-9.8 -17.9,-9.8 -17.9,-6.8
5V on Bottom Layer "5V_L04_P003" (solid, remove dead copper, pour order 3): 4.8,-15.5 4.8,-20.3 18.5,-20.3 18.5,-15.5
GND on Bottom Layer "GND_L04_P033" (solid, pour order 33): -19.5,-21.5 -19.5,21 18.5,21 18.5,-21.5
GND on Layer 1 "GND_L02_P004" (solid, pour order 4): -19.5,-21.5 -19.5,21 18.5,21 18.5,-21.5
GND on Layer 2 "GND_L03_P005" (solid, pour order 5): -19.5,-21.5 -19.5,21 18.5,21 18.5,-21.5

## Silkscreen, mask and mechanical layers (free items; w line width, h text height)
Top Overlay:
  lines w0.254: -16.384,-11.684 -14.784,-11.684 -13.534,-10.434 ; -13.384,-11.684 -11.684,-11.684
  text "-" at 2.354,8.892 h1.52
  text "-" at 15.754,8.792 h1.52
  text "+" at 11.954,3.8 h1.52
  text "+5V" at 3.054,-12.246 h1.3
  text "-" at 0.954,-13.496 h1.3
  text "-" at 8.754,-13.596 h1.3
  text "-" at -11.204,-16.646 h1.3 r90
  text "+12V" at -3.354,-18.846 h1.3 r90
M1-Outline:
  the board outline again, w0.254